# Altium PCB PCB1.PcbDoc
Units mm, origin at the board's own origin, x right, y up, seen from the top; angles counter-clockwise.
Board outline 50 x 50 mm, 2 copper layers (Top Layer, Bottom Layer); 13 components, 11 nets, 38 pads, 0 vias.
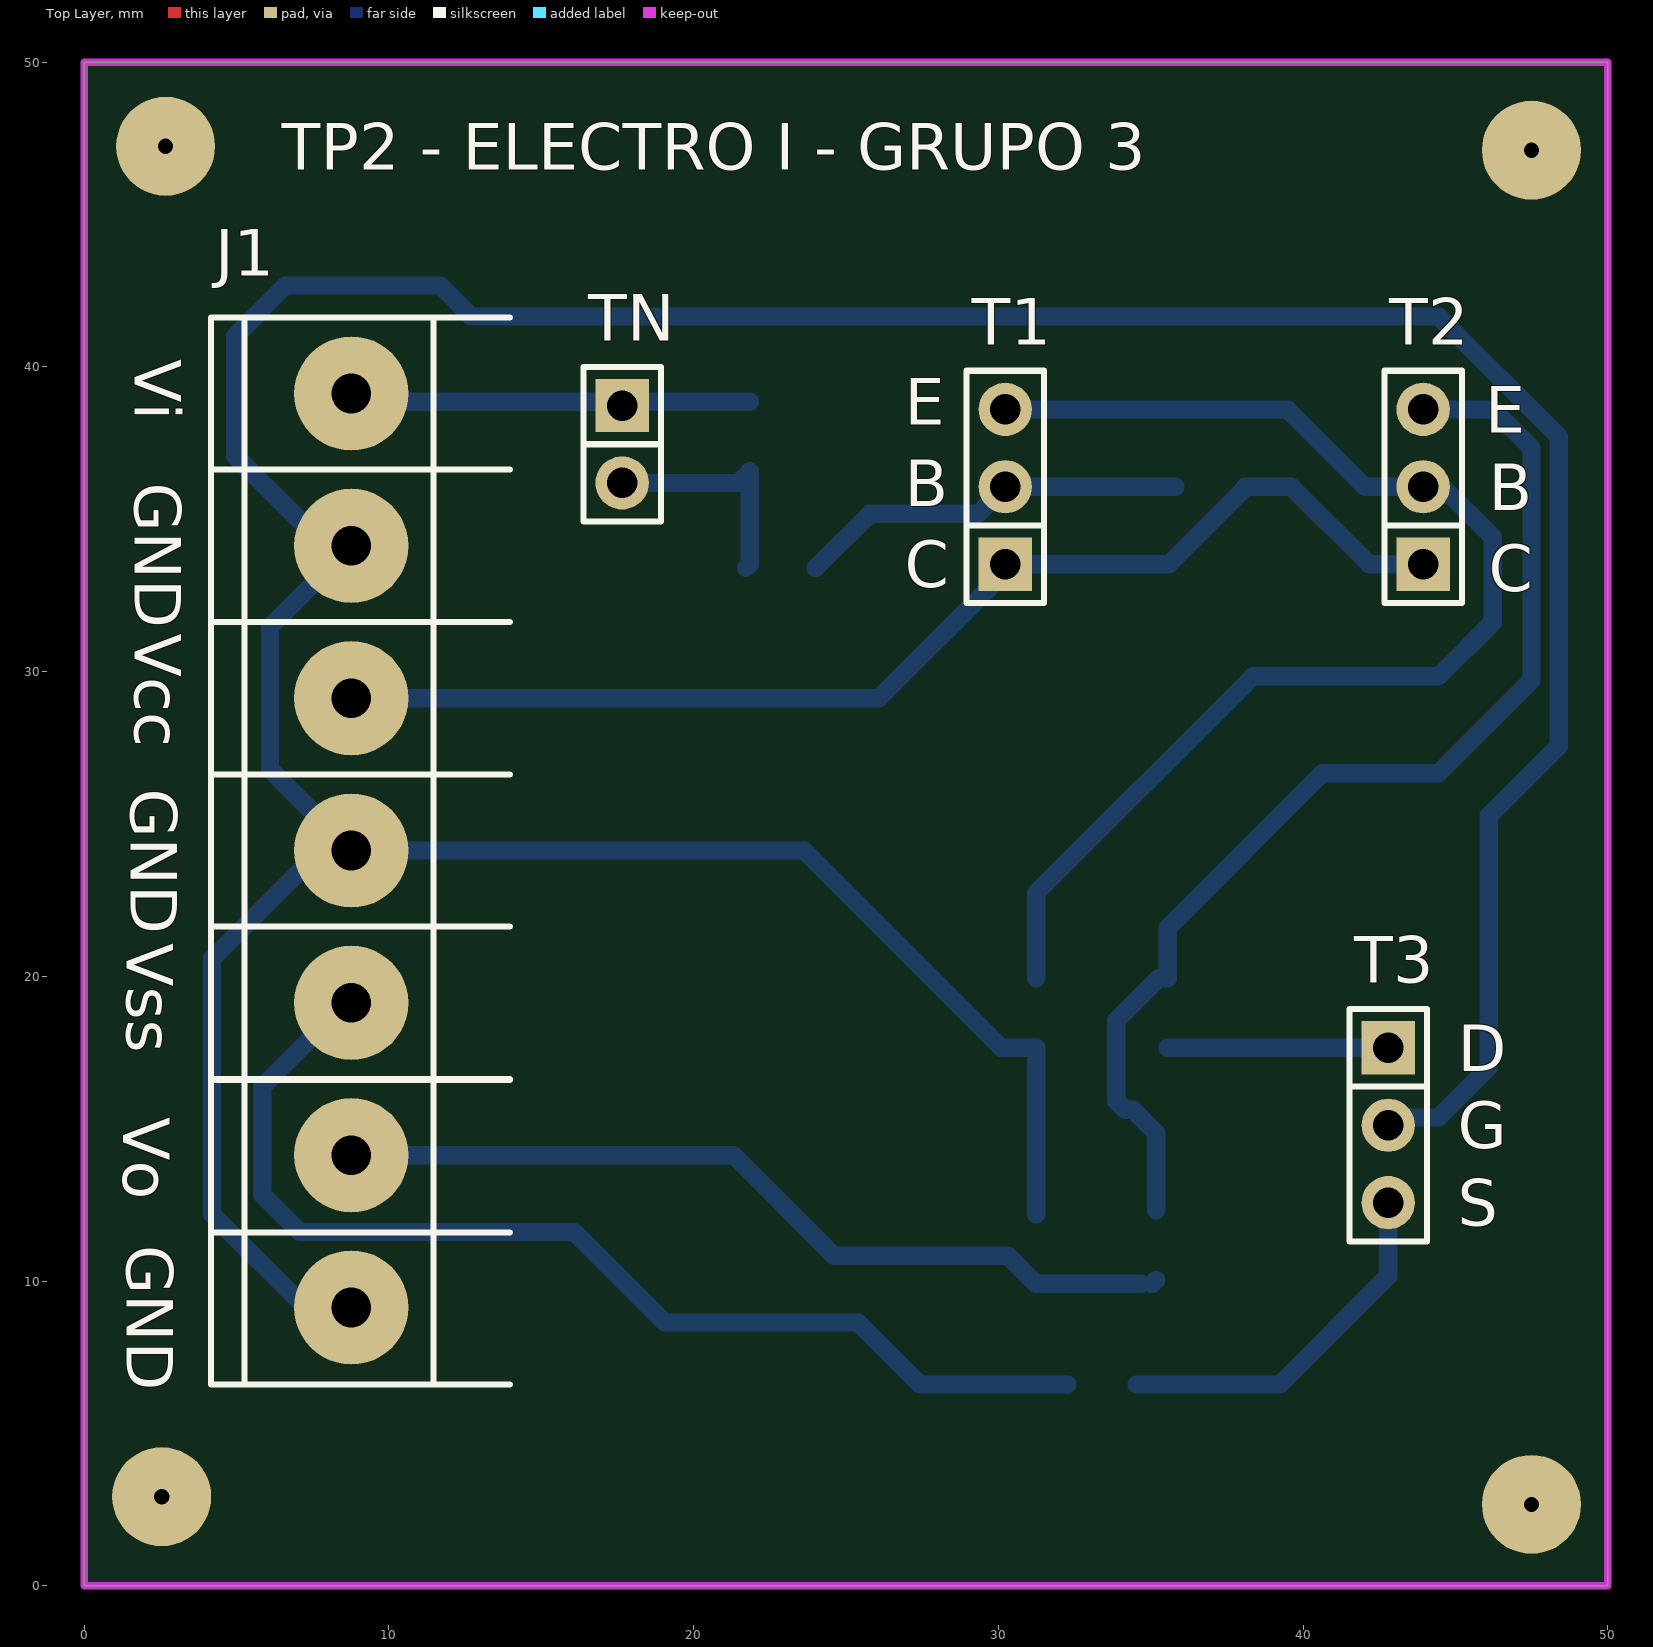
[diagram p0: Top Layer view]
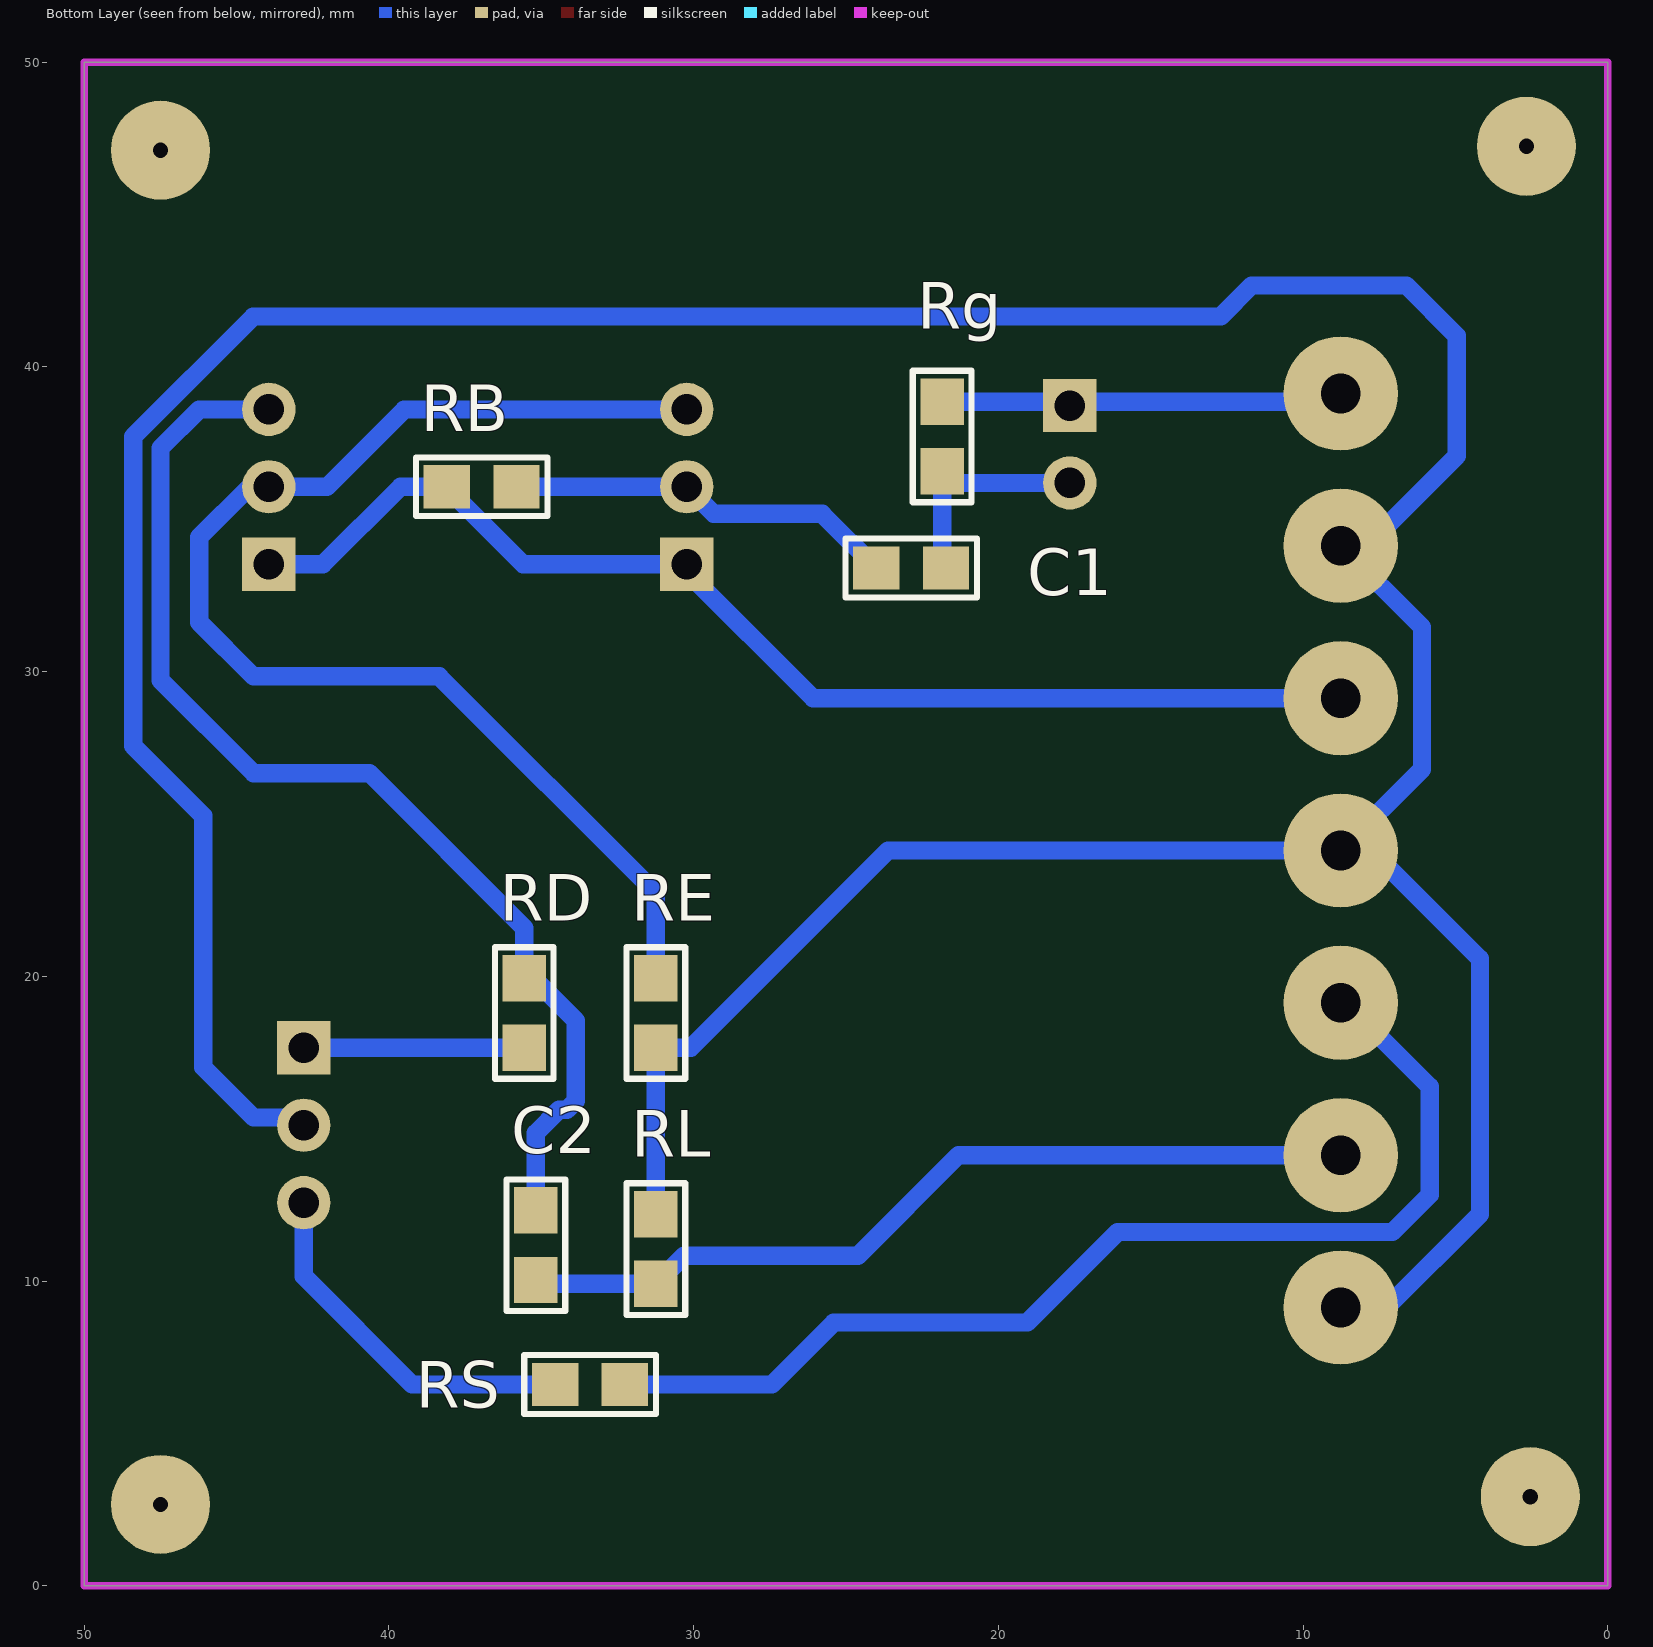
[diagram p1: Bottom Layer view, seen from below]

## Layer stack, top to bottom
Top Solder: solder mask 0.0102, Solder Resist, Dk 3.5
Top Layer: signal copper 0.0356
Dielectric 1: dielectric 0.32, FR-4, Dk 4.8
Bottom Layer: signal copper 0.0356
Bottom Solder: solder mask 0.0102, Solder Resist, Dk 3.5

## Board outline
0,0 50,0 50,50 0,50

## Design rules (kind name [scope] priority, off if disabled: settings)
Clearance [All] p1: gap=0.3 ignorepadtopadclearanceinfootprint=FALSE
PolygonConnect [All] p1: connectstyle=Relief reliefconductorwidth=0.254 reliefentries=4 polygonreliefangle="90 Angle" airgapwidth=0.254
RoutingVias [All] p1: holewidth=2 width=0.7 viastyle="Through Hole" minholewidth=2 minwidth=0.7 maxholewidth=2 maxwidth=0.7
SolderMaskExpansion [All] p1: expansion=0.102
Width [All] p1: maxlimit=0.6 minlimit=0.6 preferedwidth=0.6
30 further rules are at their usual default settings.

## Components (designator, comment, footprint, x,y, rotation, side; value= is the part's Value field where it differs from the comment)
C1 "10n" 0805 22.86,33.401 r0 bottom
C2 "10n" 0805 35.179,11.176 r270 bottom
J1 "BORNERA 7" BORNERA7 8.763,24.13 r0 top
RB "680" 0805 36.957,36.068 r0 bottom
RD "680" 0805 35.56,18.796 r90 bottom
RE "6.8K" 0805 31.242,18.796 r90 bottom
Rg "Rg" 0805 21.844,37.719 r270 bottom
RL "RL" 0805 31.242,11.049 r90 bottom
RS "6.8K" 0805 33.401,6.604 r0 bottom
T1 "NPN_1" JUMPER3 30.226,36.068 r90 top
T2 "NPN_2" JUMPER3 43.942,36.068 r90 top
T3 "N JFET" JUMPER3 42.799,15.113 r270 top
TN "JUMPER" JUMPER2 17.653,37.465 r270 top

## Footprints (in the part's own frame and the unit in brackets; to place one, negate y for a bottom-side part, rotate by r counter-clockwise, add the part's x,y. Pads: shape width x height; smd on the part's side, far side on the other; paste and mask are expansions set on the pad)
0805 [mil] "Pasivo 0805"
  rect 60x56 smd: 1(-45,0) 2(45,0)
  silkscreen extent -85,-38 85,38, body extent -39,-25 39,25, height 15
BORNERA7 [mm] "Bornera con Tornillos 5mm separación"
  round 3.75 hole 1.3: 1(0,15) 2(0,10) 3(0,5) 4(0,0) 5(0,-5) 6(0,-10) 7(0,-15)
  silkscreen extent -4.6,-17.53 5.2,17.5, body extent -3.76,-17.39 3.94,18.11, height 10.05
JUMPER2 [mm]
  rect 1.75x1.75 hole 1: 1(-1.27,0)
  round 1.75 hole 1: 2(1.27,0)
  silkscreen extent -2.54,-1.27 2.54,1.27, body extent -2.46,-1.27 2.54,1.27, height 9.5
JUMPER3 [mm]
  rect 1.75x1.75 hole 1: 1(-2.54,0)
  round 1.75 hole 1: 2(0,0) 3(2.54,0)
  silkscreen extent -3.81,-1.27 3.81,1.27, body extent -3.81,-1.3 3.81,1.27, height 16.15

## Part data
C1 C2: library part CAP
RB RD RE Rg RL RS: library part RES
T1 T2 T3: library part JUMPER3

## Free pads (board coordinates)
  round 3.25 hole 0.5: 2(2.667,47.244) 3(47.498,47.117) 4(47.498,2.667) 5(2.54,2.921)

## Nets (pads, with @x,y where several pads share a name; then routed paths per layer and width w, separated by ;. In a path a pad name is that pad's centre, name@x,y a point inside that pad or via, vN(x,y) a via of type N, cw(c..) or ccw(c..) an arc to the next point about the centre after c; other vN are vias at no path point)
GND: J1.2 J1.4 J1.7 RE.1 RL.2 T3.2 | length 144
  Bottom Layer w0.6: J1.7 7.253,9.13 4.191,12.192 4.191,20.574 7.747,24.13 J1.4 ; RL.2 RE.1 30.099,17.653 23.622,24.13 J1.4 ; T3.2 43.053,15.367 44.45,15.367 46.101,17.018 46.101,25.27 48.398,27.567 48.398,37.711 44.453,41.656 12.7,41.656 11.684,42.672 6.604,42.672 4.953,41.021 4.953,37.084 7.907,34.13 J1.2 6.096,31.463 6.096,26.797 J1.4
NetC1_1: C1.1 Rg.2 TN.2 | length 7.6
  Bottom Layer w0.6: TN.2 21.463,36.195 Rg.2 21.844,33.528 C1.1
NetC1_2: C1.2 RB.1 T1.2 | length 12.9
  Bottom Layer w0.6: C1.2 25.781,35.179 29.337,35.179 T1.2 RB.1
NetC2_1: C2.1 RD.2 T2.3 | length 37.8
  Bottom Layer w0.6: C2.1 35.179,14.859 34.417,15.621 34.163,15.621 33.868,15.916 33.868,18.542 35.265,19.939 RD.2 35.56,21.59 40.64,26.67 44.45,26.67 47.498,29.718 47.498,37.338 46.228,38.608 T2.3
NetRD_1: RD.1 T3.1 | length 7.2
  Bottom Layer w0.6: RD.1 T3.1
NetRE_2: RE.2 T1.3 T2.2 | length 42
  Bottom Layer w0.6: T1.3 39.497,38.608 42.037,36.068 T2.2 44.577,36.068 46.228,34.417 46.228,31.623 44.45,29.845 38.354,29.845 31.242,22.733 RE.2
NetRS_2: RS.2 T3.3 | length 12.1
  Bottom Layer w0.6: RS.2 39.243,6.604 42.799,10.16 T3.3
VCC: J1.3 RB.2 T1.1 T2.1 | length 39.3
  Bottom Layer w0.6: J1.3 26.082,29.13 30.226,33.274 T1.1 35.596,33.528 38.1,36.032 RB.2 39.624,36.068 42.164,33.528 T2.1
Vin: J1.1 Rg.1 TN.1 | length 13.2
  Bottom Layer w0.6: J1.1 9.031,38.862 Rg.1
Vo: C2.2 J1.6 RL.1 | length 27.8
  Bottom Layer w0.6: J1.6 21.303,14.13 24.603,10.83 30.318,10.83 RL.1 C2.2@34.671,9.906 ; C2.2@35.052,9.906 C2.2
VSS: J1.5 RS.1 | length 36.6
  Bottom Layer w0.6: J1.5 8.589,19.13 5.842,16.383 5.842,12.827 7.064,11.605 16.081,11.605 19.05,8.636 25.4,8.636 27.432,6.604 RS.1

## Keep-outs
Keep-Out Layer:
  the board outline again, w0.254

## Silkscreen, mask and mechanical layers (free items; w line width, h text height)
Top Overlay:
  text "TP2 - ELECTRO I - GRUPO 3" at 6.477,46.482 h1.52
  text "Vi" at 1.651,40.259 h1.52 r270
  text "E" at 26.924,38.1 h1.52
  text "E" at 45.974,37.846 h1.52
  text "GND" at 1.651,36.195 h1.52 r270
  text "B" at 26.924,35.433 h1.52
  text "B" at 46.101,35.306 h1.52
  text "C" at 26.924,32.766 h1.52
  text "C" at 46.101,32.639 h1.52
  text "Vcc" at 1.651,31.242 h1.52 r270
  text "GND" at 1.524,26.162 h1.52 r270
  text "Vss" at 1.397,21.082 h1.52 r270
  text "D" at 45.085,16.891 h1.52
  text "Vo" at 1.27,15.367 h1.52 r270
  text "G" at 45.085,14.351 h1.52
  text "S" at 45.085,11.811 h1.52
  text "GND" at 1.397,11.176 h1.52 r270